# Altium PCB H-bridge.PcbDoc
Units mil, origin at the board's own origin, x right, y up, seen from the top; angles counter-clockwise.
Board outline 6000 x 4000 mil, 2 copper layers (Top Layer, Bottom Layer); 18 components, 14 nets, 48 pads, 0 vias.
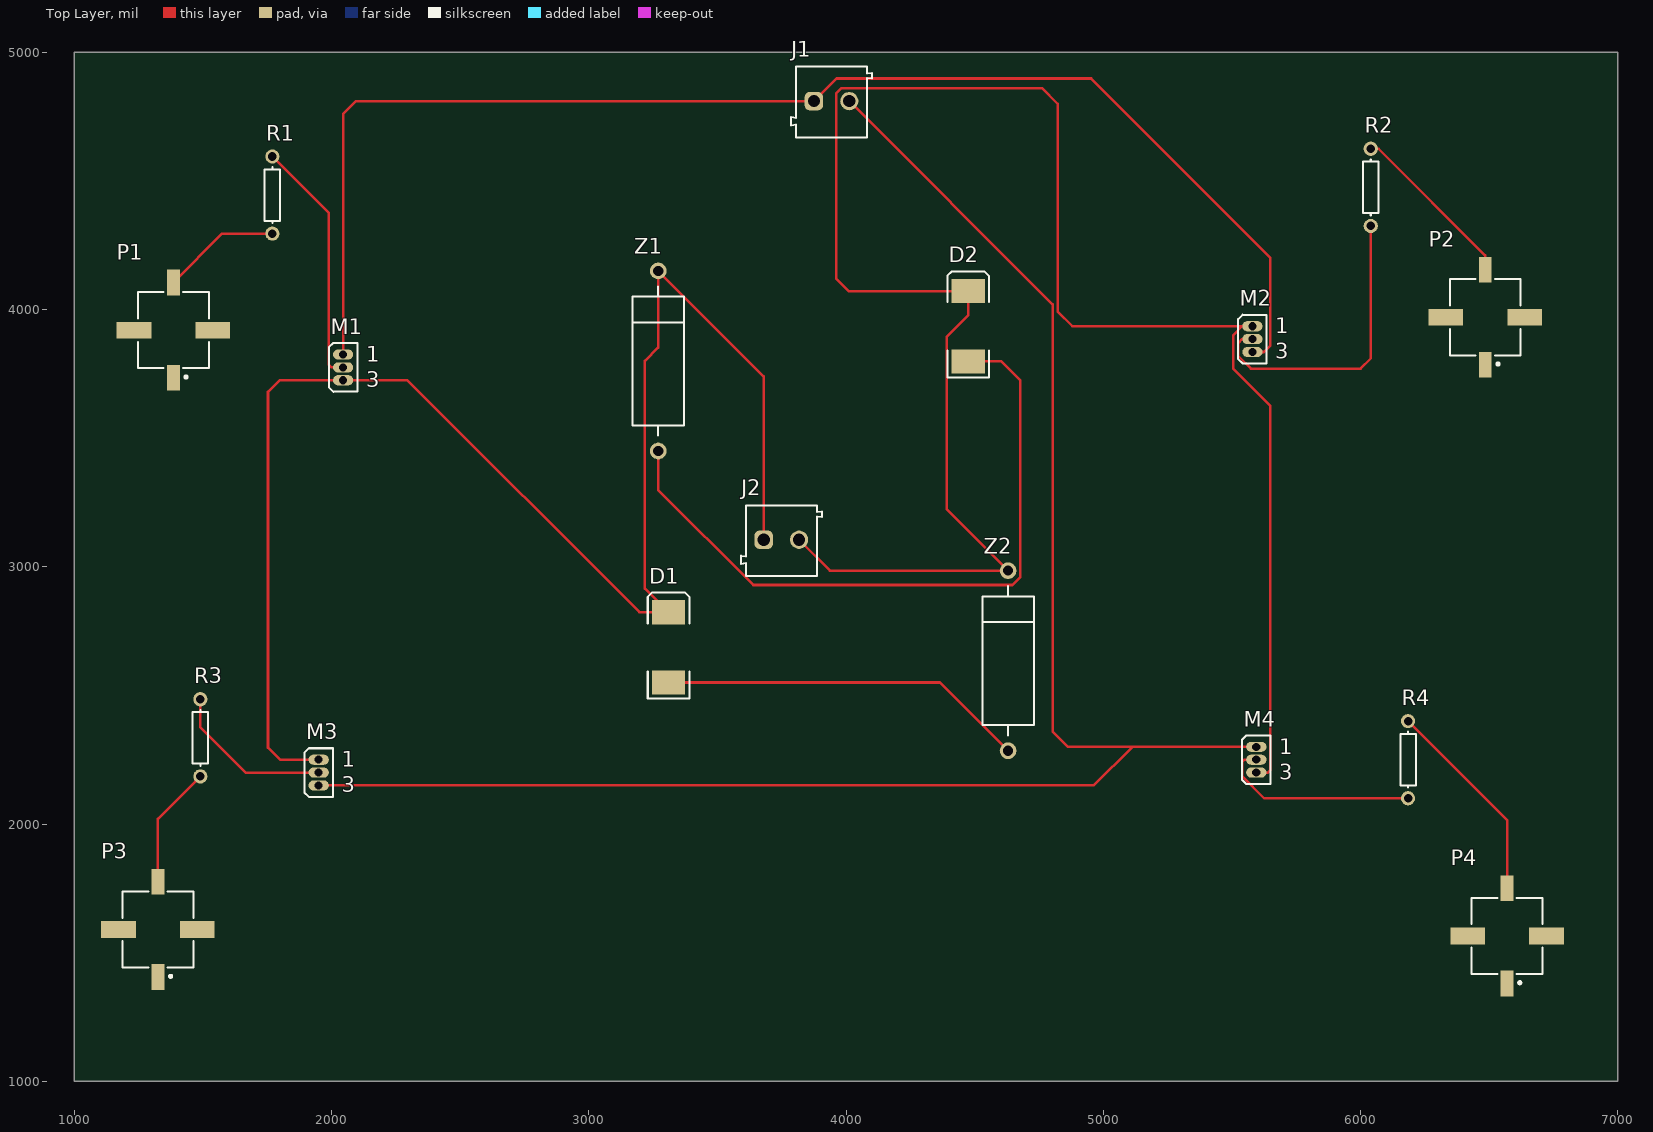
[diagram p0: Top Layer view]
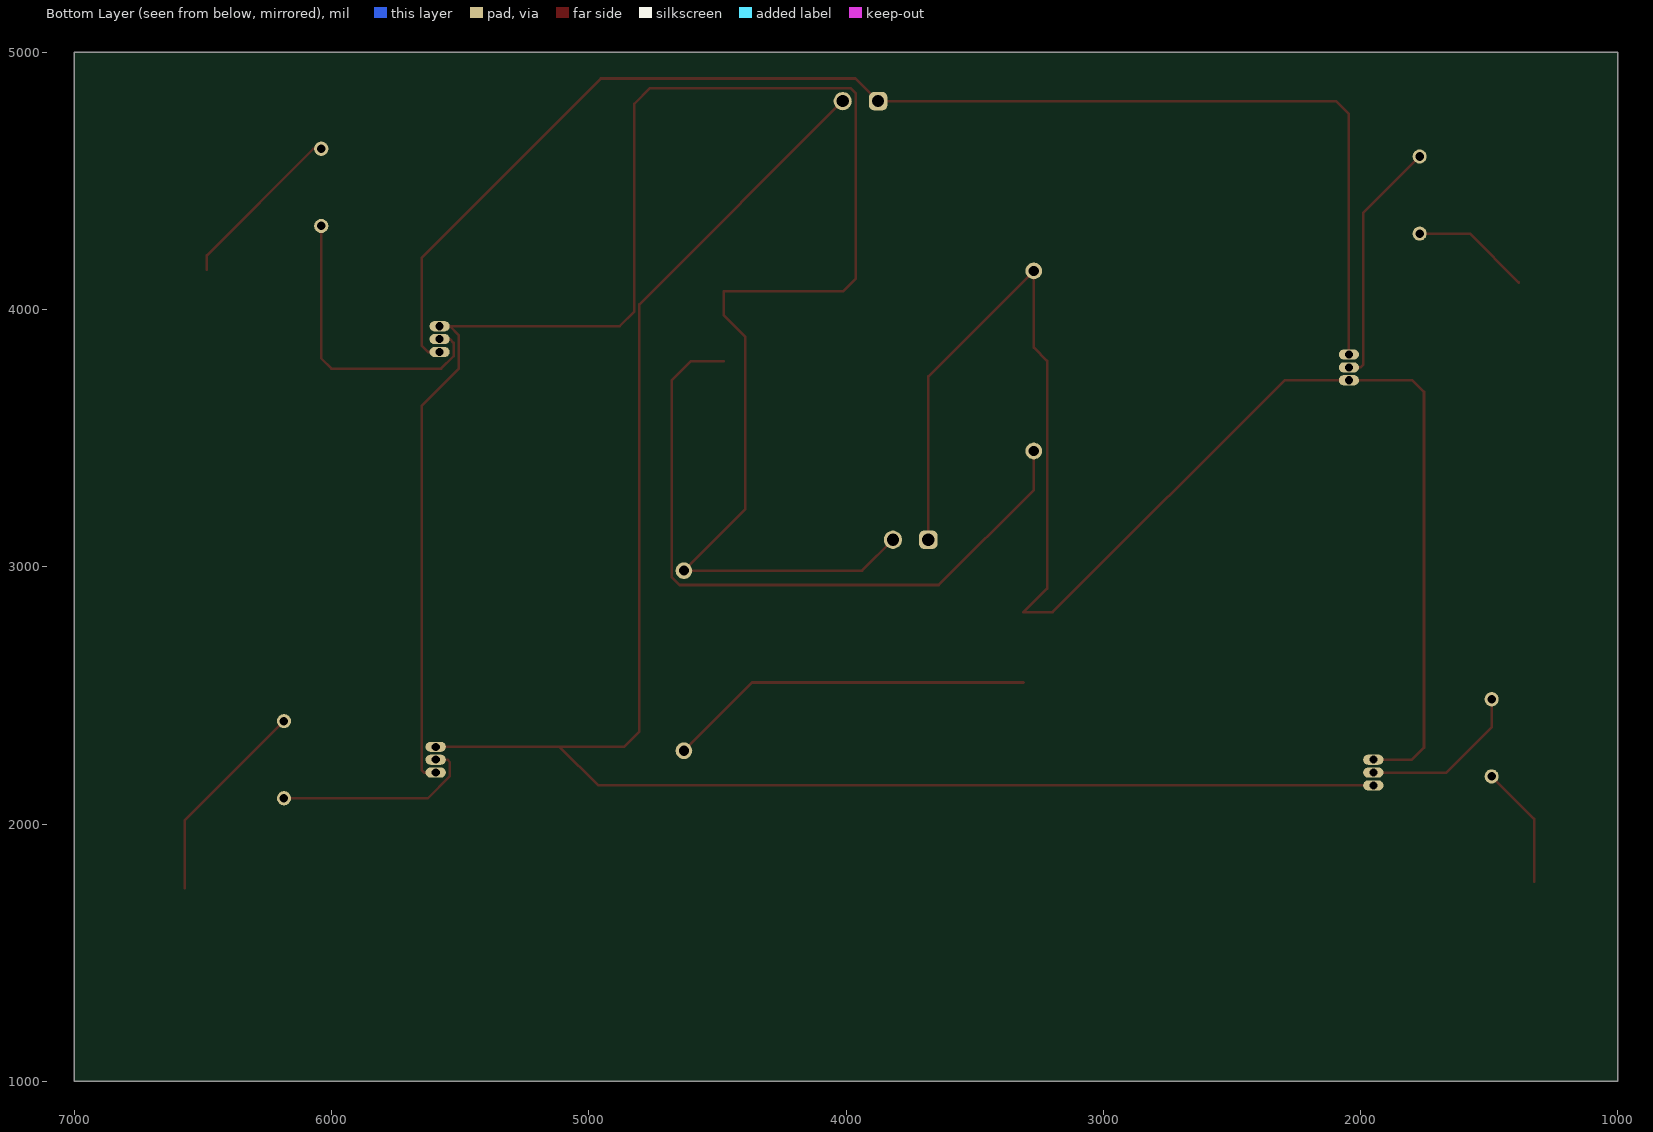
[diagram p1: Bottom Layer view, seen from below]

## Layer stack, top to bottom
Top Solder: solder mask 0.4, Solder Resist, Dk 3.5
Top Layer: signal copper 1.4
Dielectric 1: dielectric 12.6, FR-4, Dk 4.8
Bottom Layer: signal copper 1.4
Bottom Solder: solder mask 0.4, Solder Resist, Dk 3.5

## Board outline
1000,1000 7000,1000 7000,5000 1000,5000

## Design rules (kind name [scope] priority, off if disabled: settings)
Clearance [All] p1: gap=10 ignorepadtopadclearanceinfootprint=FALSE
PolygonConnect [All] p1: connectstyle=Relief reliefconductorwidth=10 reliefentries=4 polygonreliefangle="90 Angle" airgapwidth=10
RoutingVias [All] p1: holewidth=28 width=50 viastyle="Through Hole" minholewidth=28 minwidth=50 maxholewidth=28 maxwidth=50
SolderMaskExpansion [All] p1: expansion=4 istentingtop=FALSE
Width [All] p1: maxlimit=10 minlimit=10 preferedwidth=10
30 further rules are at their usual default settings.

## Components (designator, comment, footprint, x,y, rotation, side; value= is the part's Value field where it differs from the comment)
D1 "Diode" SMC 3310,2686.81 r90 top
D2 "Diode" SMC 4475,3935 r90 top
J1 "691103110002" 691103110002 53943.9,54806.06 r0 top
J2 "691103110002" 691103110002 53748.9,53101.06 r0 top
M1 "MOSFET-P" E3 2045,3775 r0 top
M2 "MOSFET-P" E3 5580,3885 r0 top
M3 "MOSFET-N" E3 1950,2200 r0 top
M4 "MOSFET-N" E3 5595,2250 r0 top
P1 "662002231822" 662002231822 1385,3920 r0 top
P2 "662002231822" 662002231822 6485,3970 r0 top
P3 "662002231822" 662002231822 1325,1590 r0 top
P4 "662002231822" 662002231822 6570,1565 r0 top
R1 "Res1" AXIAL-0.3 1770,4445 r90 top value=220
R2 "Res1" AXIAL-0.3 6040,4475 r90 top
R3 "Res1" AXIAL-0.3 1490,2335 r90 top value=220
R4 "Res1" AXIAL-0.3 6185,2250 r90 top value=220
Z1 "D Zener" DIODE-0.7 3270,3800 r90 top
Z2 "D Zener" DIODE-0.7 4630,2635 r90 top

## Footprints (in the part's own frame and the unit in brackets; to place one, negate y for a bottom-side part, rotate by r counter-clockwise, add the part's x,y. Pads: shape width x height; smd on the part's side, far side on the other; paste and mask are expansions set on the pad)
662002231822 [mm] "3.00mm SMT Male Dual Row Vertical Header with SMT Solder Tab, 2p"
  rect 1.27x2.54 smd: 1(0,-4.7) 2(0,4.7)
  rect 3.43x1.65 smd: MP1(-3.895,0) MP2(3.895,0)
  silkscreen extent -3.5,-4.75 3.5,3.75, body extent -5.6,-5.7 5.6,5.7, height 9.93
691103110002 [mm] "3,50mm - modular - blue - Horizontal wire entry - Pressure clamp - 8,4mm height - 02p"
  rrect50% 1.8x1.8 hole 1.2: 1(-1271.75,-1269.9)
  round 1.8 hole 1.2: 2(-1268.25,-1269.9)
  silkscreen extent -1274,-1273.5 -1266,-1266.5, body extent -1274,-1273.5 -1266,-1266.5, height 8.45
AXIAL-0.3 [mm] "Axial Device, Thru-Hole; 2 Leads; 0.3 in Pin Spacing"
  round 1.4 hole 0.85: 1(-3.81,0) 2(3.81,0)
  silkscreen extent -2.77,-0.76 2.77,0.76
DIODE-0.7 [mm] "Diode, Thru-Hole; 2 Leads; 0.7 in Pin Spacing"
  round 1.65 hole 1: 1(-8.89,0) 2(8.89,0)
  silkscreen extent -7.37,-2.54 7.37,2.54
E3 [mm] "TO, Flat Index; 3 In-Line, Axial Leads; Body Dia. 4.6mm; Lead Dia. 0.5 mm (max)"
  oval 2x1 hole 0.8: 1(0,1.27) 2(0,0) 3(0,-1.27)
  silkscreen extent -1.41,-2.41 1.41,2.41
SMC [mm] "DO-214-AB/SMC; 2 C-Bend Leads; Body 7.9 x 5.9 mm, inc. leads (LxW)"
  rect 2.4x3.3 smd: 1(-3.475,0) 2(3.475,0)
  silkscreen extent -5.07,-2.05 5.43,2.06

## Part data
D1 D2: "Default Diode", Code_JEDEC=DO-214-AB, LatestRevisionDate=17-Jul-2002, LatestRevisionNote="Re-released for DXP Platform.", PackageDescription="DO-214-AB/SMC; 2 C-Bend Leads; Body 7.9 x 5.9 mm, inc. leads (LxW)", PackageReference=SMC, PackageVersion=Sep-1996, Published=8-Jun-2000, Publisher="Altium Limited"
J1 J2: library part CMP-1502-03254-2, Color=Blue, Current=10A, Max Operating Temperature=105°C, Min Operating Temperature=-40°C, Voltage=125V, Contact Material="Brass, Copper, Nickel, Tin, Zinc", Contact Plating=Tin, Current Rating=10A, Height=8.5mm, Housing Material=Nylon, Lead Pitch=3.5mm, Length=7mm, Mount="Through Hole", NexarPartId=18818286, Number of Contacts=2, Number of Levels=1, Number of Pins=2, Number of Positions Per Level=2, Number of Rows=1, Packaging=Box, Pitch=3.5052mm, Plating=Steel, REACH SVHC=Unknown, RoHS=Compliant, Stripping Length=-6mm, Termination=Screw, Voltage Rating=125V, Width=8mm, Wire Gauge (Max)=26AWG, Wire Gauge (Min)=16AWG, Wire/Cable Gauge=26AWG
M1 M2: "P-Channel MOSFET", LatestRevisionDate=17-Jul-2002, LatestRevisionNote="Re-released for DXP Platform.", PackageDescription="TO, Flat Index; 3 In-Line, Axial Leads; Body Dia. 4.6mm; Lead Dia. 0.5 mm (max)", PackageReference=E3, PackageVersion=1995/1996, Published=8-Jun-2000, Publisher="Altium Limited"
M3 M4: "N-Channel MOSFET", LatestRevisionDate=17-Jul-2002, LatestRevisionNote="Re-released for DXP Platform.", PackageDescription="TO, Flat Index; 3 In-Line, Axial Leads; Body Dia. 4.6mm; Lead Dia. 0.5 mm (max)", PackageReference=E3, PackageVersion=1995/1996, Published=8-Jun-2000, Publisher="Altium Limited"
P1 P2 P3 P4: library part CMP-1502-00340-2, Color=Black, Contact Resistance=10mΩ, Current Rating=5A, Insulation Resistance=1GΩ, Max Operating Temperature=105°C, Min Operating Temperature=-40°C, Operating Supply Voltage=250V, Connector Type="Male Pin, Socket", Contact Material=Copper, Contact Plating=Tin, Fastening Type=Ramp, Gender=Male, Height=9.9mm, Housing Material=Nylon, Lead Pitch=3mm, Length=6.7mm, Mount="Surface Mount", NexarPartId=8917600, Number of Contacts=2, Number of Pins=2, Number of Positions=2, Number of Rows=2, Orientation=Vertical, Pitch=3mm, REACH SVHC=Unknown, RoHS=Compliant, Row Spacing=2.9972mm, Termination=Solder, Width=6.7mm
R1 R2 R3 R4: "Resistor", LatestRevisionDate=17-Jul-2002, LatestRevisionNote="Re-released for DXP Platform.", PackageDescription="Axial Device, Thru-Hole; 2 Leads; 0.3 in Pin Spacing", PackageReference=AXIAL-0.3, Published=8-Jun-2000, Publisher="Altium Limited"
  R2: R2=220
Z1 Z2: "Zener Diode", LatestRevisionDate=17-Jul-2002, LatestRevisionNote="Re-released for DXP Platform.", PackageDescription="Diode, Thru-Hole; 2 Leads; 0.7 in Pin Spacing", PackageReference=DIODE-0.7, Published=8-Jun-2000, Publisher="Altium Limited"

## Nets (pads, with @x,y where several pads share a name; then routed paths per layer and width w, separated by ;. In a path a pad name is that pad's centre, name@x,y a point inside that pad or via, vN(x,y) a via of type N, cw(c..) or ccw(c..) an arc to the next point about the centre after c; other vN are vias at no path point)
GND: J1.2 M3.3 M4.1 | length 6819.3
  Top Layer w10: M3.3 4963,2150 5113,2300 ; J1.2 4803,4019.8 4803,2360 4863,2300 5113,2300 ; M4.1 5113,2300
NetD1_1: D1.1 Z2.1 | length 1429.8
  Top Layer w10: D1.1 4365,2550 Z2.1
NetD1_2: D1.2 J2.1 M1.3 M3.1 Z1.2 | length 6149.3
  Top Layer w10: M3.1 1800,2250 1753,2297 1753,3680 1798,3725 M1.3 2295,3725 3196.38,2823.62 D1.2 3218,2915.62 3218,3800 3270,3852 Z1.2 3680,3740 J2.1
NetD2_1: D2.1 Z1.1 | length 2722.9
  Top Layer w10: Z1.1 3270,3299 3640,2929 4647,2929 4678,2960 4678,3724.19 4604,3798.19 D2.1
NetD2_2: D2.2 J2.2 M2.1 M4.3 Z2.2 | length 7677.2
  Top Layer w10: J2.2 3937.8,2985 Z2.2 4391,3224 4391,3893 4475,3977 D2.2 4010.19,4071.81 3962,4120 3962,4840 3983,4861 4762,4861 4823,4800 4823,3992 4880,3935 5540,3935 ; M2.1 5540,3935 ; M4.3 5640,2200 5650,2210 5650,3624.95 5505.63,3769.32 5505.63,3900.63 5540,3935
NetJ1_1: J1.1 M1.1 M2.3 | length 5307.2
  Top Layer w10: M1.1 2045,4760 2095,4810 J1.1 3963,4898 4953,4898 5650,4201 5650,3860 5625,3835 M2.3
NetM1_2: M1.2 R1.2 | length 960.3
  Top Layer w10: R1.2 1990,4375 1990,3785 2000,3775 M1.2
NetM2_2: M2.2 R2.1 | length 1178.6
  Top Layer w10: M2.2 5540,3885 5525.63,3870.63 5525.63,3818.37 5574,3770 6000,3770 6040,3810 R2.1
NetM3_2: M3.2 R3.2 | length 641.9
  Top Layer w10: R3.2 1490,2376 1666,2200 M3.2
NetM4_2: M4.2 R4.1 | length 793.8
  Top Layer w10: M4.2 5550,2250 5540,2240 5540,2186 5626,2100 R4.1
NetP1_2: P1.2 R1.1 | length 463.7
  Top Layer w10: P1.2 1574.96,4295 R1.1
NetP2_2: P2.2 R2.2 | length 671.9
  Top Layer w10: R2.2 6070,4625 6485,4210 P2.2
NetP3_2: P3.2 R3.1 | length 478.3
  Top Layer w10: P3.2 1325,2020 R3.1
NetP4_2: P4.2 R4.2 | length 809.4
  Top Layer w10: R4.2 6570,2015 P4.2
pads on no net: P1.1 P1.MP1 P1.MP2 P2.1 P2.MP1 P2.MP2 P3.1 P3.MP1 P3.MP2 P4.1 P4.MP1 P4.MP2

## Text inside footprints (layer, text, board x,y; h text height)
M1: Top Overlay "1" at 2134.57,3796.85 h59.05; Top Overlay "3" at 2134.57,3697.72 h59.05
M2: Top Overlay "3" at 5669.57,3807.72 h59.05; Top Overlay "1" at 5669.57,3906.85 h59.05
M3: Top Overlay "1" at 2039.57,2221.85 h59.05; Top Overlay "3" at 2039.57,2122.72 h59.05
M4: Top Overlay "1" at 5684.57,2271.85 h59.05; Top Overlay "3" at 5684.57,2172.72 h59.05